# Altium PCB YAVP.PcbDoc (part 3 of 4)
Units mil, origin at the board's own origin, x right, y up, seen from the top; angles counter-clockwise.
Board outline 3188.93 x 2893.7 mil, 6 copper layers (Top Layer, Top, Mid-Layer 1, Top-Int, Mid-Layer 2, Bop-Int, Mid-Layer 3, Top-Mid, Mid-Layer 4, Bop-Mid, Bottom Layer, Bottom); 418 components, 278 nets, 1150 pads, 440 vias.
Unrouted connection lines stored in the file: 12.
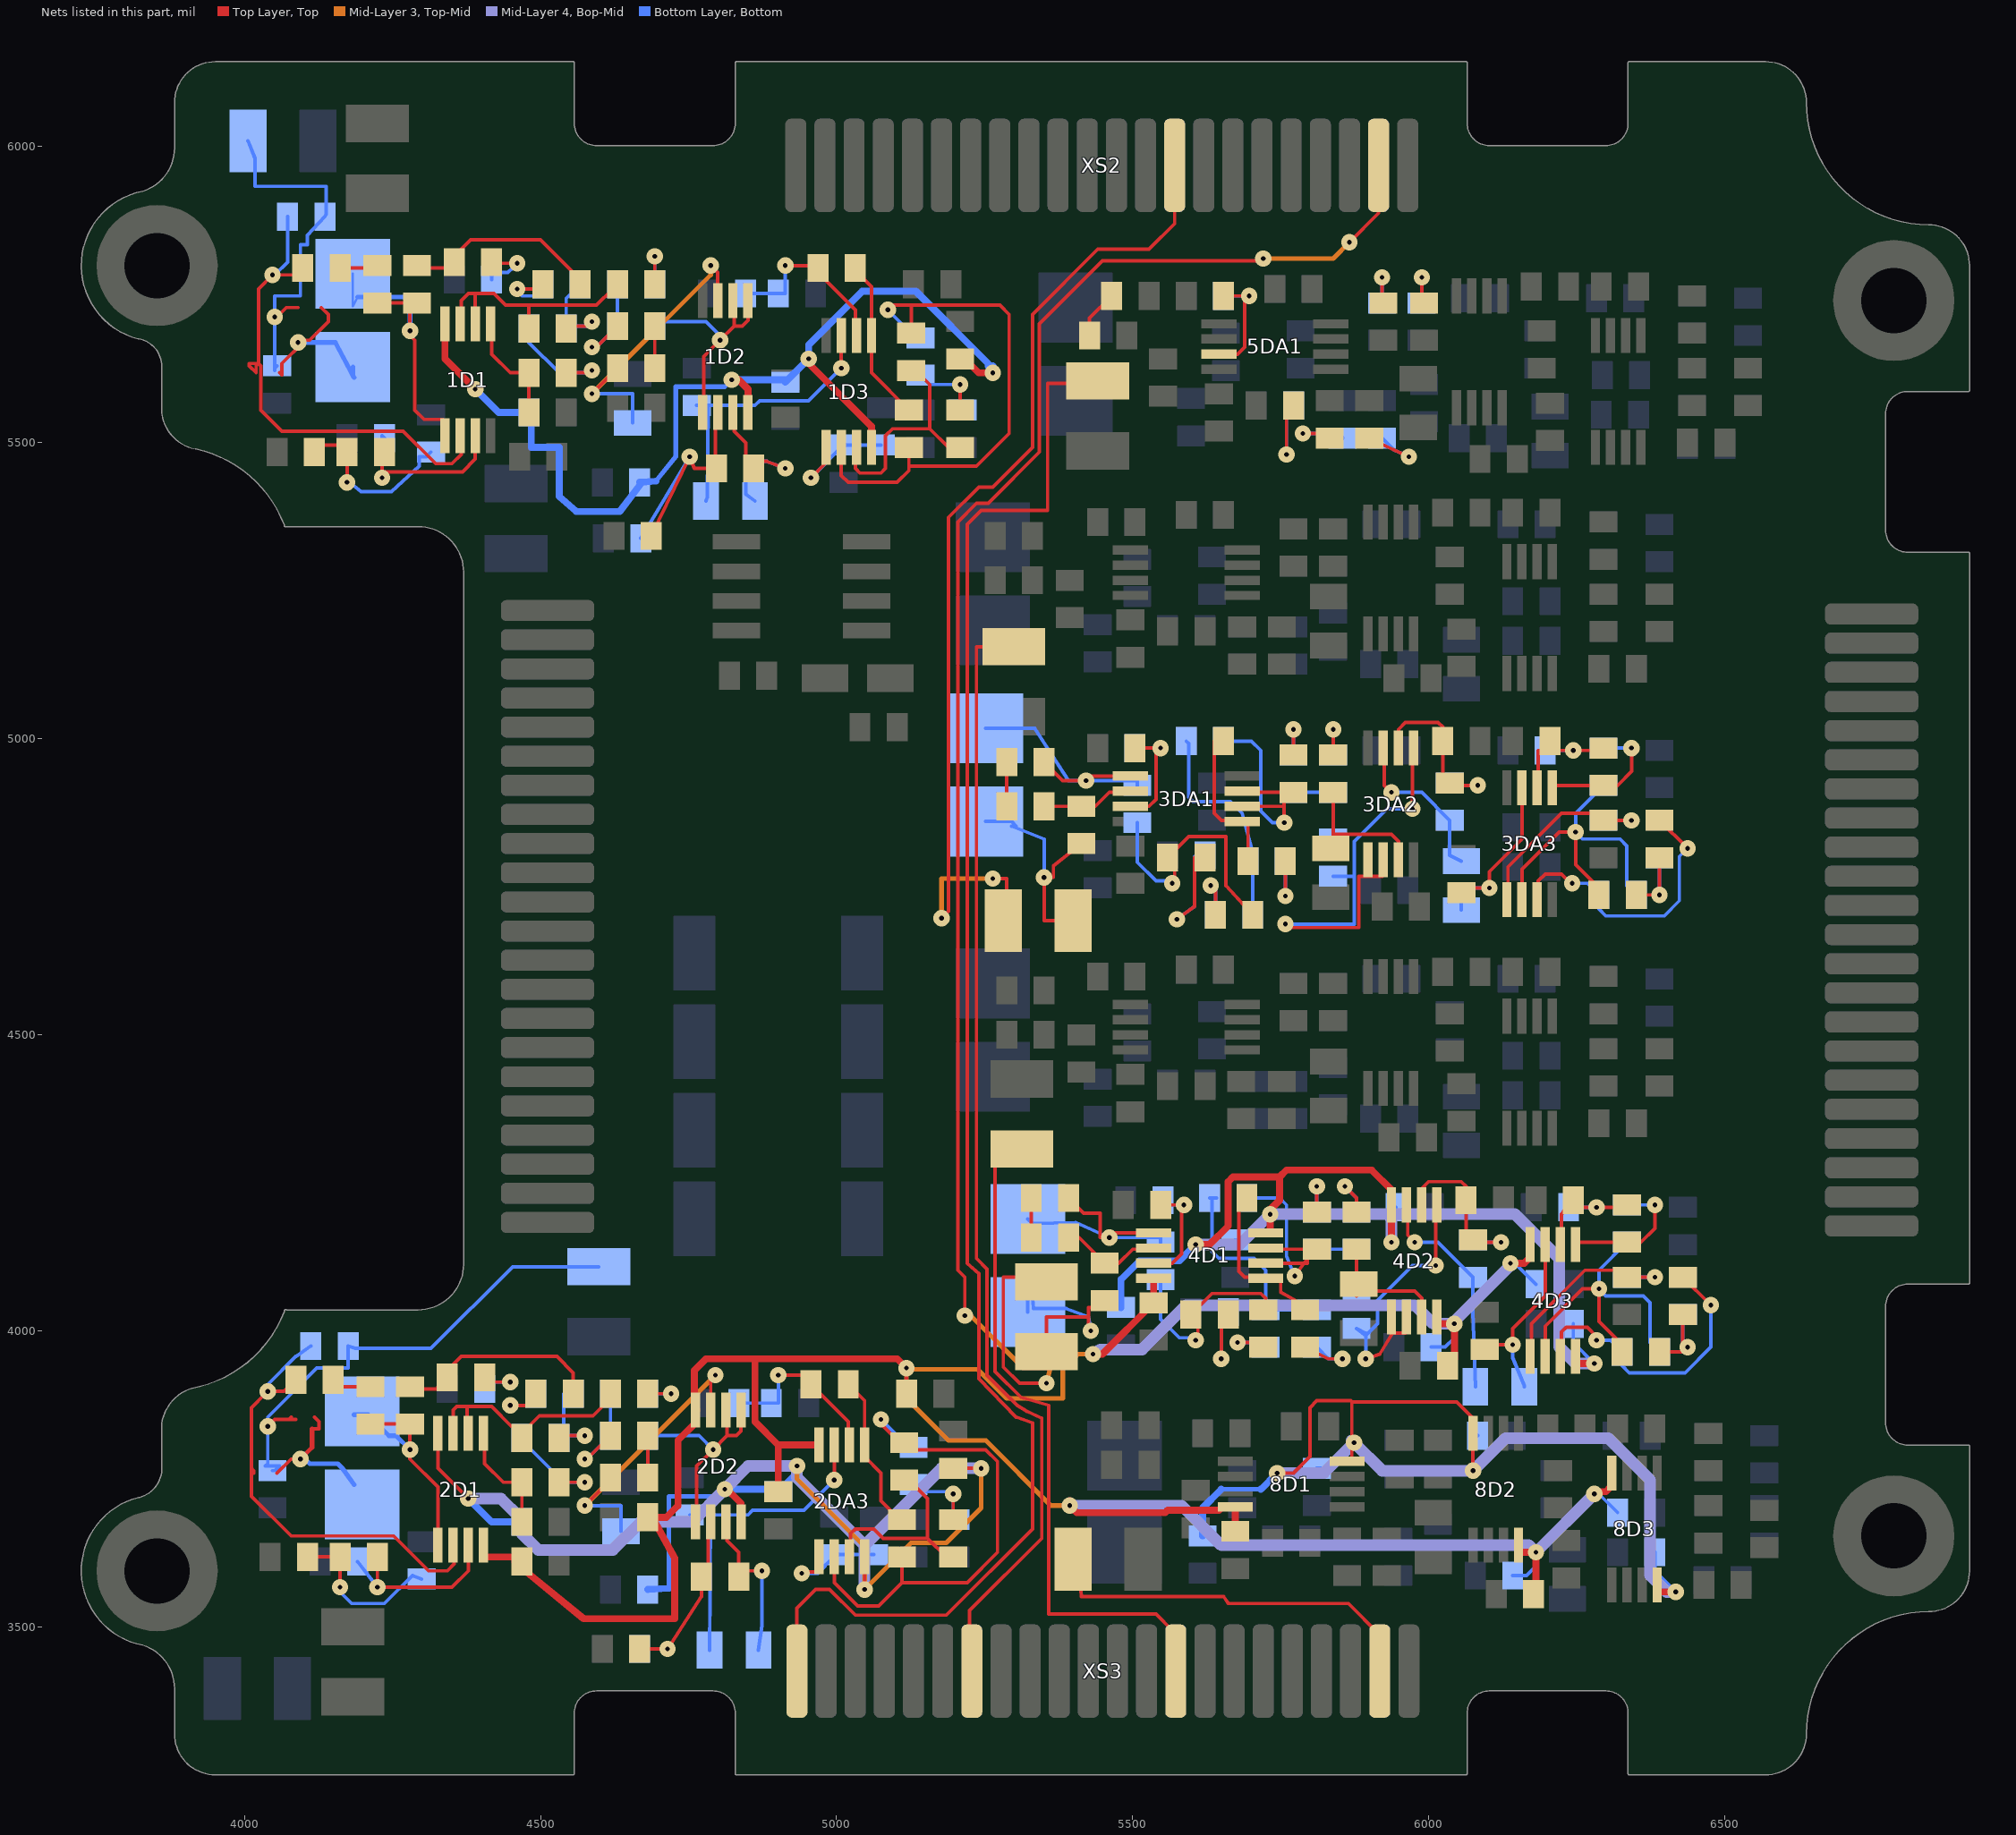
[diagram p7: the nets of this part, all layers, seen from the top]

## Via types
v1: diameter 27.56, hole 7.87, Top Layer, Top to Bottom Layer, Bottom, 440 vias

## Nets (pads, with @x,y where several pads share a name; then routed paths per layer and width w, separated by ;. In a path a pad name is that pad's centre, name@x,y a point inside that pad or via, vN(x,y) a via of type N, cw(c..) or ccw(c..) an arc to the next point about the centre after c; other vN are vias at no path point) (continued)
IN3Q: 3C1.1 XS2.34 | length 1789.6
  Top Layer, Top w5.91: v1(5177.17,4696.85) 5188.98,4708.66 5188.98,5374.02 5240.16,5425.2 5263.78,5425.2 5330.71,5492.13 5330.71,5716.54 5440.94,5826.77 5527.56,5826.77 5570.87,5870.08 XS2.34@5570.87,5968.5 ; v1(5263.78,4763.78) 5287.4,4763.78 3C1.1@5287.4,4687.01 ; 3C1.1@5287.4,4687.01 5287.4,4677.17 5281.5,4683.07 3C1.1@5281.5,4692.91 3C1.1@5287.4,4687.01
  Mid-Layer 3, Top-Mid w7.87: v1(5177.17,4696.85) 5177.17,4763.78 v1(5263.78,4763.78)
IN4Q: 4C1.1 XS2.41 | length 3020.6
  Top Layer, Top w5.91: v1(5216.54,4025.59) 5216.54,4090.55 5204.72,4102.36 5204.72,5366.14 5236.22,5397.64 5255.91,5397.64 5342.52,5484.25 5342.52,5700.79 5448.82,5807.09 5720.47,5807.09 v1(5720.47,5811.02) ; v1(5354.33,3911.42) 5309.06,3911.42 5281.5,3938.98 5281.5,4090.55 5338.58,4090.55 5348.43,4080.71 5354.33,4086.61 4C1.1@5354.33,4082.68 ; v1(5866.14,5838.58) 5915.35,5887.8 XS2.41@5915.35,5968.5
  Mid-Layer 3, Top-Mid w7.87: v1(5216.54,4025.59) 5216.54,4035.43 5314.96,3937.01 5358.27,3937.01 5360.24,3935.04 v1(5354.33,3911.42) ; v1(5720.47,5811.02) 5838.58,5811.02 v1(5866.14,5838.58)
IN5Q: 5C1.1 XS3.42 | length 2829.7
  Top Layer, Top w5.91: XS3.42@4933.07,3425.2 4933.07,3531.5 4964.57,3562.99 4988.19,3562.99 5031.5,3519.68 5185.04,3519.68 5330.71,3665.35 5330.71,3844.49 5303.15,3854.33 5240.16,3919.29 5240.16,4096.46 5220.47,4114.17 5220.47,5362.2 5244.09,5385.83 5356.3,5385.83 5356.3,5600.39 5C1.1@5407.48,5600.39 ; 5C1.1@5407.48,5600.39 5440.94,5600.39 5C1.1@5440.94,5604.33 5411.42,5604.33 5C1.1@5407.48,5600.39
IN6Q: 6C1.1 XS3.36 | length 1899.1
  Top Layer, Top w5.91: XS3.36@5228.35,3425.2 5228.35,3500 5224.41,3503.94 5224.41,3527.56 5346.46,3649.61 5346.46,3852.36 5320.87,3864.17 5305.12,3874.02 5253.94,3925.2 5253.94,4104.33 5236.22,4122.05 5236.22,5155.51 6C1.1@5299.21,5155.51
IN7Q: 7C1.1 XS3.29 | length 1292.2
  Top Layer, Top w5.91: XS3.29@5570.87,3427.17 5570.87,3490.16 5566.93,3494.09 5539.37,3521.65 5358.27,3521.65 5358.27,3874.02 5311.02,3887.8 5267.72,3931.1 5267.72,4307.09 7C1.1@5285.43,4307.09 ; 7C1.1@5285.43,4307.09 5297.24,4307.09 7C1.1@5312.99,4307.09 5312.99,4322.83 5303.15,4332.68 5295.28,4332.68 7C1.1@5293.31,4330.71 ; 7C1.1@5285.43,4307.09 7C1.1@5289.37,4311.02 ; 7C1.1@5289.37,4311.02 5273.62,4311.02 7C1.1@5293.31,4330.71 ; 7C1.1@5289.37,4311.02 7C1.1@5293.31,4314.96 ; 7C1.1@5293.31,4314.96 7C1.1@5293.31,4316.93 ; 7C1.1@5293.31,4314.96 5295.28,4316.93 7C1.1@5293.31,4316.93 ; 7C1.1@5293.31,4316.93 7C1.1@5293.31,4330.71
  Top Layer, Top w7.87: XS3.29@5570.87,3427.17 5570.87,3425.2 XS3.29@5572.83,3425.2
IN8Q: 8C1.1 XS3.22 | length 669.8
  Top Layer, Top w5.91: 8C1.1@5399.61,3614.17 5409.45,3614.17 5413.39,3610.24 5413.39,3574.8 5411.42,3574.8 5413.39,3551.18 5653.54,3551.18 5661.42,3539.37 5864.17,3539.37 5917.32,3486.22 XS3.22@5917.32,3425.2
NET00000: 1D1.8 1D2.8 1D3.8 C14.1 C30.1 C46.1 R29.1 | length 1856.6
  Top Layer, Top w5.91: v1(4822.83,5606.3) v1@4834.65,5606.3 ; 1D2.8@4850.39,5551.18 1D2.8@4850.39,5578.74 ; R29.1@5208.66,5641.73 5208.66,5645.67 R29.1@5208.66,5649.61
  Top Layer, Top w11.81: 1D1.8@4338.58,5700.79 4338.58,5641.73 v1(4389.76,5590.55) ; v1@4834.65,5606.3 4850.39,5590.55 1D2.8@4850.39,5578.74 ; v1(4952.76,5641.73) 4952.76,5633.86 5059.06,5527.56 1D3.8@5059.06,5492.13 ; R29.1@5208.66,5649.61 5240.16,5618.11 v1(5263.78,5618.11)
  Bottom Layer, Bottom w5.91: C14.1@4480.31,5543.31 C14.1@4480.31,5551.18 ; 4811.02,5594.49 v1(4822.83,5606.3)
  Bottom Layer, Bottom w7.87: 4694.88,5435.04 4728.35,5476.38 4728.35,5594.49 4811.02,5594.49
  Bottom Layer, Bottom w11.81: v1(4389.76,5590.55) 4429.13,5551.18 C14.1@4480.31,5551.18 ; C14.1@4480.31,5543.31 4484.25,5539.37 4484.25,5492.13 4531.5,5492.13 4531.5,5409.45 4560.28,5383.86 4633.86,5383.86 4671.26,5433.07 4694.88,5435.04 C30.1@4667.32,5433.07 ; v1(4822.83,5606.3) 4913.39,5606.3 C46.1@4913.39,5602.36 4925.2,5614.17 v1(4952.76,5641.73) 4952.76,5665.35 5043.31,5755.91 5133.86,5755.91 5255.91,5633.86 5255.91,5629.92 5263.78,5629.92 v1(5263.78,5618.11)
NET1: 
NET00002: 2D1.4 2D2.4 2DA3.4 4D1.4 4D2.4 4D3.4 8D1.4 8D2.4 8D3.4 C17.2 C21.2 C29.2 C33.2 C37.2 C45.2 C48.2 C53.2 C60.2 R32.1 R36.1 R44.1 | length 5322.4
  Top Layer, Top w5.91: 2D1.4@4403.54,3637.8 4405.51,3637.8 2D1.4@4405.51,3618.11 ; R32.1@5118.11,3893.7 v1(5118.11,3937.01) ; 8D1.4@5651.57,3702.76 8D1.4@5673.23,3702.76 ; 4D2.4@6013.78,4023.62 6013.78,4013.78 4D2.4@6015.75,4011.81 ; 4D3.4@6171.26,4124.02 4D3.4@6171.26,4145.67 ; v1(6279.53,3724.41) v1@6283.46,3728.35 ; 8D3.4@6307.09,3736.22 8D3.4@6309.06,3759.84
  Top Layer, Top w11.81: 2D1.4@4405.51,3618.11 4456.69,3618.11 4456.69,3610.24 C17.2@4464.57,3602.36 ; C17.2@4468.5,3610.24 4468.5,3606.3 C17.2@4464.57,3602.36 ; C33.2@4681.1,3685.04 C33.2@4688.98,3685.04 ; 2D2.4@4763.78,3866.14 2D2.4@4761.81,3866.14 2D2.4@4759.84,3866.14 ; C48.2@4901.57,3728.35 4901.57,3807.09 ; 2DA3.4@4970.47,3807.09 4901.57,3807.09 ; v1(5118.11,3937.01) 5102.36,3952.76 4862.2,3952.76 ; v1@5393.7,3712.6 v1(5393.7,3704.72) 5393.7,3700.79 5397.64,3700.79 5405.51,3692.91 5555.12,3692.91 5559.06,3696.85 5645.67,3696.85 8D1.4@5651.57,3702.76 ; v1(5433.07,3960.63) 5448.82,3960.63 C21.2@5535.43,4047.24 4D1.4@5535.43,4088.58 ; C29.2@5673.23,3661.42 8D1.4@5673.23,3702.76 ; 4D2.4@6015.75,4011.81 v1(6043.31,4011.81) 6043.31,3952.76 R36.1@6031.5,3940.94 ; v1(6137.8,4114.17) 6161.42,4114.17 4D3.4@6171.26,4124.02 ; 8D2.4@6151.57,3637.8 6151.57,3625.98 v1(6181.1,3625.98) 6181.1,3574.8 6177.17,3570.87 6169.29,3566.93 6177.17,3559.06 R44.1@6177.17,3555.12 ; v1@6283.46,3728.35 6299.21,3728.35 8D3.4@6307.09,3736.22 ; C17.2@4464.57,3602.36 4572.83,3513.78 4726.38,3513.78 4726.38,3616.14 C33.2@4688.98,3685.04 ; C33.2@4688.98,3685.04 4712.6,3685.04 4732.28,3704.72 4732.28,3814.96 4759.84,3842.52 2D2.4@4759.84,3866.14 ; 2D2.4@4759.84,3866.14 4759.84,3933.07 4779.53,3952.76 4862.2,3952.76 ; 4862.2,3952.76 4862.2,3846.46 4901.57,3807.09
  Mid-Layer 3, Top-Mid w7.87: v1(5393.7,3704.72) 5362.2,3704.72 5251.97,3814.96 5188.98,3814.96 5118.11,3885.83 v1(5118.11,3937.01) 5118.11,3940.94 5122.05,3937.01 5124.02,3935.04 5238.19,3935.04 5287.4,3885.83 5381.89,3885.83 5381.89,3935.2 5407.32,3960.63 v1(5433.07,3960.63)
  Mid-Layer 4, Bop-Mid w5.91: v1(5433.07,3960.63) 5440.94,3968.5 5444.88,3968.5 ; v1@6031.5,4011.81 v1(6043.31,4011.81) v1@6043.31,4015.75 ; v1@6137.8,4110.24 6133.86,4114.17 v1(6137.8,4114.17) ; v1@6178.24,3628.85 6181.45,3628.85 6181.1,3628.5 v1(6181.1,3625.98) v1@6178.24,3628.85
  Mid-Layer 4, Bop-Mid w19.68: v1(5393.7,3704.72) 5582.68,3704.72 5649.61,3637.8 6169.29,3637.8 v1@6178.24,3628.85 ; v1(5433.07,3960.63) 5437.01,3960.63 5444.88,3968.5 5515.75,3968.5 5590.55,4043.31 5976.38,4043.31 6007.87,4011.81 v1@6031.5,4011.81 ; v1@6043.31,4015.75 6137.8,4110.24 v1(6137.8,4114.17) ; v1(6181.1,3625.98) v1(6279.53,3724.41)
  Bottom Layer, Bottom w5.91: C37.2@6003.94,3972.44 6027.56,3972.44 6043.31,3988.19 v1(6043.31,4011.81) ; v1(6137.8,4114.17) 6145.67,4114.17 C53.2@6181.1,4078.74 ; C45.2@6141.73,3586.61 6165.35,3586.61 6181.1,3602.36 v1(6181.1,3625.98) ; v1(6279.53,3724.41) 6283.46,3728.35 C60.2@6318.9,3692.91
NET00003: 2D1.8 2D2.8 2DA3.8 4D1.8 4D2.8 4D3.8 8D1.8 8D2.8 8D3.8 C16.1 C22.1 C28.1 C32.1 C36.1 C44.1 C49.1 C52.1 C61.1 R31.1 R35.1 R43.1 | length 6706.1
  Top Layer, Top w5.91: 2D1.8@4326.77,3826.77 4326.77,3767.72 v1(4377.95,3716.54) ; v1(4811.02,3732.28) v1@4811.02,3736.22 ; 2D2.8@4838.58,3677.17 4838.58,3708.66 ; v1(5047.24,3562.99) 2DA3.8@5047.24,3618.11 ; R31.1@5196.85,3767.72 v1(5244.09,3767.72) ; 4D1.8@5724.41,4165.35 4D1.8@5732.28,4165.35 ; v1@5728.35,4200.79 v1(5732.28,4196.85) ; v1(5744.09,3759.84) 5771.65,3759.84 5799.21,3787.4 5799.21,3870.08 5811.02,3881.89 5868.11,3881.89 5870.08,3879.92 ; 8D1.8@5862.2,3779.53 5870.08,3779.53 5870.08,3807.09 v1(5874.02,3811.02) 5870.08,3814.96 5870.08,3879.92 ; v1(6074.8,3763.78) 8D2.8@6074.8,3826.77 6074.8,3850.39 6074.8,3852.36 6047.24,3879.92 5870.08,3879.92 ; 4D3.8@6248.03,3944.88 4D3.8@6248.03,3956.69 ; 8D3.8@6385.83,3559.06 8D3.8@6385.83,3570.87
  Top Layer, Top w11.81: v1@4811.02,3736.22 4838.58,3708.66 ; v1(5606.3,4145.67) 5629.92,4145.67 5661.42,4177.17 5661.42,4251.97 5669.29,4259.84 5748.03,4259.84 ; v1@5728.35,4200.79 5748.03,4220.47 5748.03,4259.84 ; 4D1.8@5732.28,4165.35 v1(5732.28,4196.85) ; v1(5937.01,4149.61) 4D2.8@5937.01,4212.6 5937.01,4238.19 5903.54,4271.65 5759.84,4271.65 5748.03,4259.84 ; 4D3.8@6248.03,3944.88 v1(6279.53,3944.88) ; 8D3.8@6385.83,3559.06 v1(6417.32,3559.06)
  Mid-Layer 3, Top-Mid w7.87: v1(4933.07,3771.65) 4933.07,3750 5047.24,3635.83 v1(5047.24,3562.99) 5125.98,3641.73 5185.04,3641.73 5244.09,3700.79 v1(5244.09,3767.72)
  Mid-Layer 4, Bop-Mid w5.91: v1@6275.59,3944.88 v1(6279.53,3944.88)
  Mid-Layer 4, Bop-Mid w19.68: v1(4377.95,3716.54) 4433.07,3716.54 4464.57,3685.04 4468.5,3657.48 4496.06,3629.92 4622.05,3629.92 4669.29,3677.17 4755.91,3677.17 v1(4811.02,3732.28) 4850.39,3771.65 v1(4933.07,3771.65) 4933.07,3751.97 5047.24,3637.8 ; v1(5047.24,3562.99) 5047.24,3637.8 ; v1(5244.09,3767.72) 5177.17,3767.72 5047.24,3637.8 ; v1(5606.3,4145.67) 5681.1,4145.67 v1(5732.28,4196.85) 5937.01,4196.85 ; v1(5744.09,3759.84) 5822.83,3759.84 v1(5874.02,3811.02) ; v1@5870.08,3814.96 v1(5874.02,3811.02) ; v1(5937.01,4149.61) 5937.01,4196.85 ; v1@6275.59,3944.88 6248.03,3944.88 6220.47,3972.44 6220.47,4122.05 6145.67,4196.85 5937.01,4196.85 ; v1(6417.32,3559.06) 6401.57,3559.06 6374.02,3586.61 6374.02,3748.03 6303.15,3818.9 6129.92,3818.9 v1(6074.8,3763.78) 5921.26,3763.78 v1(5874.02,3811.02)
  Bottom Layer, Bottom w5.91: C49.1@4901.57,3728.35 C49.1@4901.57,3732.28 ; C22.1@5673.23,4153.54 5681.1,4153.54 5724.41,4196.85 v1(5732.28,4196.85) ; C28.1@5811.02,3767.72 5826.77,3767.72 5830.71,3767.72 v1(5874.02,3811.02) ; v1(5937.01,4149.61) 5937.01,4208.66 C36.1@5944.88,4208.66 ; v1(6074.8,3763.78) 6074.8,3822.83 C44.1@6082.68,3822.83 ; C52.1@6244.09,4011.81 6244.09,3980.32 v1(6279.53,3944.88) ; C61.1@6381.89,3625.98 6381.89,3594.49 v1(6417.32,3559.06)
  Bottom Layer, Bottom w7.87: 4716.54,3564.96 4716.54,3720.47 4795.28,3720.47 ; 5649.61,3732.28 5716.54,3732.28
  Bottom Layer, Bottom w11.81: v1(4377.95,3716.54) 4417.32,3677.17 C16.1@4464.57,3677.17 ; C32.1@4681.1,3562.99 4716.54,3564.96 ; 4795.28,3720.47 4807.09,3732.28 v1(4811.02,3732.28) C49.1@4901.57,3732.28 ; C49.1@4897.64,3724.41 C49.1@4901.57,3728.35 4933.07,3759.84 v1(4933.07,3771.65) ; R35.1@5480.31,4039.37 5480.31,4086.61 5511.81,4118.11 5578.74,4118.11 v1(5606.3,4145.67) ; R43.1@5618.11,3653.54 5618.11,3700.79 5649.61,3732.28 ; 5716.54,3732.28 v1(5744.09,3759.84)
  Bottom Layer, Bottom w19.68: C16.1@4464.57,3677.17 C16.1@4468.5,3677.17
NET00019: 2R6.1 2R7.2 | length 106.3
  Top Layer, Top w5.91: 2R6.1@4405.51,3921.26 4405.51,3913.39 v1(4448.82,3913.39)
  Bottom Layer, Bottom w5.91: 2R7.2@4405.51,3901.57 4405.51,3913.39 v1(4448.82,3913.39)
NET00020: 2R8.1 2R9.2 | length 129.9
  Top Layer, Top w5.91: v1(4448.82,3874.02) 4492.13,3874.02 2R8.1@4492.13,3893.7 2R8.1@4492.13,3897.64
  Bottom Layer, Bottom w5.91: v1(4448.82,3874.02) 4492.13,3874.02 2R9.2@4492.13,3893.7
NET00034: 2R3.1 2R4.2 | length 74.8
  Top Layer, Top w5.91: 2R3.1@4149.61,3917.32 4149.61,3905.51 2R4.2@4212.6,3905.51
NET00037: 2R12.1 2R13.2 | length 78.7
  Top Layer, Top w5.91: 2R12.1@4681.1,3893.7 v1(4720.47,3893.7)
  Bottom Layer, Bottom w5.91: 2R13.2@4681.1,3893.7 v1(4720.47,3893.7)
NET00045: 2R10.1 2R11.2 | length 188.5
  Top Layer, Top w5.91: 2R11.2@4531.5,3744.09 v1(4574.8,3744.09)
  Bottom Layer, Bottom w5.91: 2R10.1@4468.5,3818.9 4464.57,3818.9 4539.37,3744.09 v1(4574.8,3744.09)
NET00046: 2R14.1 2R15.2 | length 70.9
  Top Layer, Top w5.91: 2R15.2@4681.1,3751.97 2R14.1@4681.1,3822.83
NET00047: 2C1.2 2JP1Q.1 2R1.2 2R5U.1 | length 869.1
  Top Layer, Top w5.91: v1(4039.37,3838.58) 4051.18,3850.39 4074.8,3850.39 ; 2JP1Q.1@4078.74,3854.33 4074.8,3850.39 ; 4086.61,3850.39 4074.8,3850.39
  Bottom Layer, Bottom w5.91: 2R5U.1@4047.24,3763.78 4051.18,3763.78 4059.06,3771.65 4035.43,3771.65 4039.37,3775.59 4039.37,3834.65 v1(4039.37,3838.58) 4039.37,3854.33 4122.05,3937.01 4175.2,3937.01 2R1.2@4175.2,3974.41 4187.01,3970.47 4314.96,3970.47 4452.76,4108.27 2C1.2@4598.43,4108.27
NET00049: 2R1U.1 2R2.1 2R3_.2 | length 280.8
  Top Layer, Top w5.91: 2R1U.1@4106.3,3618.11 2R3_.2@4161.42,3618.11 v1(4161.42,3566.93)
  Bottom Layer, Bottom w5.91: v1(4161.42,3566.93) 4161.42,3559.06 4181.1,3539.37 4236.22,3539.37 4283.46,3586.61 2R2.1@4299.21,3580.71
NET00052: 2C2.1 2D1.3 2R3_.1 | length 314.2
  Top Layer, Top w5.91: 2R3_.1@4224.41,3618.11 v1(4224.41,3566.93) 4350.39,3566.93 4377.95,3594.49 2D1.3@4377.95,3637.8
  Bottom Layer, Bottom w5.91: 2C2.1@4190.94,3610.24 v1(4224.41,3566.93)
NET00053: 2C3.1 2D1.1 2R4.1 2R5Q.2 | length 410.2
  Top Layer, Top w5.91: 2R4.1@4212.6,3842.52 2R5Q.2@4279.53,3842.52 v1(4279.53,3799.21) 4279.53,3783.46 4326.77,3736.22 2D1.1@4326.77,3637.8
  Bottom Layer, Bottom w7.87: 2C3.1@4185.04,3858.27 4208.66,3858.27 4244.09,3822.83 4255.91,3822.83 v1(4279.53,3799.21)
NET00054: 2C3.2 2JP1Q.2 2JP1U.2 | length 254.5
  Top Layer, Top w5.91: 2JP1U.2@4055.12,3759.84 4078.74,3783.46 v1(4094.49,3783.46) ; 4114.17,3834.65 4125.98,3834.65 4125.98,3846.46 2JP1Q.2@4118.11,3854.33
  Top Layer, Top w7.87: v1(4094.49,3783.46) 4114.17,3803.15 4114.17,3834.65
  Bottom Layer, Bottom w7.87: v1(4094.49,3783.46) 4102.36,3783.46 4110.24,3775.59 4157.48,3775.59 4165.35,3767.72 2C3.2@4185.04,3740.16
NET00055: 2D1.2 2JP1U.1 2R1.1 2R3.2 | length 812
  Top Layer, Top w5.91: 2JP1U.1@4015.75,3759.84 4015.75,3763.78 4011.81,3767.72 ; v1@4039.37,3905.51 v1@4039.37,3901.57 ; 2R3.2@4086.61,3917.32 4078.74,3909.45 4066.93,3897.64 v1(4039.37,3897.64) ; 2D1.2@4352.36,3637.8 4354.33,3637.8 4354.33,3606.3 4342.52,3594.49 4311.02,3594.49 4251.97,3653.54 4078.74,3653.54 4011.81,3720.47 4011.81,3767.72 ; 4011.81,3767.72 4011.81,3870.08 4035.43,3893.7 v1@4035.43,3897.64 ; v1@4035.43,3897.64 v1(4039.37,3897.64) ; v1@4035.43,3897.64 v1@4039.37,3901.57 ; v1(4039.37,3897.64) v1@4039.37,3901.57
  Bottom Layer, Bottom w5.91: v1(4039.37,3897.64) 4039.37,3909.45 4086.61,3956.69 2R1.1@4112.2,3974.41
NET00056: 2R5Q.1 2R6.2 2R8.2 | length 360.7
  Top Layer, Top w5.91: 2R5Q.1@4279.53,3905.51 4279.53,3901.57 4326.77,3901.57 4326.77,3905.51 2R6.2@4342.52,3921.26 4346.46,3925.2 4350.39,3925.2 4350.39,3940.94 4366.14,3956.69 4527.56,3956.69 4555.12,3929.13 4555.12,3913.39 2R8.2@4555.12,3893.7
NET00057: 2C4.1 2R9.1 2R10.2 | length 186.7
  Top Layer, Top w5.91: 2C4.1@4531.5,3818.9 4531.5,3822.83 v1(4574.8,3822.83)
  Bottom Layer, Bottom w5.91: 2R9.1@4555.12,3893.7 4539.37,3893.7 2R10.2@4539.37,3822.83 ; v1(4574.8,3822.83) 2R10.2@4539.37,3822.83 ; 2R10.2@4535.43,3822.83 2R10.2@4539.37,3822.83 ; 2R10.2@4535.43,3822.83 2R10.2@4531.5,3818.9 4531.5,3822.83 2R10.2@4535.43,3822.83
NET00059: 2C5.1 2D1.5 2R11.1 | length 196.1
  Top Layer, Top w5.91: 2D1.5@4403.54,3826.77 4405.51,3826.77 4405.51,3775.59 4437.01,3744.09 2R11.1@4468.5,3744.09 2C5.1@4468.5,3677.17
NET00060: 2C4.2 2D1.6 2D1.7 2R12.2 | length 422.3
  Top Layer, Top w5.91: 2D1.7@4352.36,3826.77 4354.33,3826.77 4352.36,3828.74 4352.36,3866.14 4358.27,3872.05 4375.98,3872.05 ; 2D1.6@4377.95,3826.77 4375.98,3828.74 4375.98,3872.05 ; 2C4.2@4468.5,3818.9 4468.5,3826.77 2C4.2@4480.31,3838.58 ; 2R12.2@4618.11,3893.7 4618.11,3885.83 4588.58,3856.3 4498.03,3856.3 2C4.2@4480.31,3838.58 ; 4375.98,3872.05 4417.32,3872.05 4450.79,3838.58 2C4.2@4480.31,3838.58
NET00061: 2C7.1 2D2.3 2R15.1 | length 543.6
  Top Layer, Top w5.91: v1(4574.8,3704.72) 4618.11,3748.03 2R15.1@4618.11,3751.97 ; 2D2.3@4787.4,3866.14 4787.4,3917.32 v1(4795.28,3925.2)
  Mid-Layer 3, Top-Mid w7.87: v1(4574.8,3704.72) v1(4795.28,3925.2)
  Bottom Layer, Bottom w5.91: v1(4574.8,3704.72) 4635.83,3704.72 2C7.1@4635.83,3661.42
NET00064: 2C6.1 2R13.1 2R14.2 | length 190.1
  Top Layer, Top w5.91: v1(4574.8,3783.46) 4578.74,3783.46 2R14.2@4618.11,3822.83
  Bottom Layer, Bottom w5.91: v1(4574.8,3783.46) 4578.74,3783.46 2C6.1@4618.11,3822.83 2R13.1@4618.11,3893.7
NET00065: 2C8.1 2D2.7 2R17.1 | length 276.3
  Top Layer, Top w5.91: 2D2.7@4812.99,3677.17 4814.96,3677.17 4814.96,3645.67 4834.65,3625.98 2R17.1@4834.65,3594.49 ; 2R17.1@4834.65,3584.65 2R17.1@4834.65,3594.49 ; v1(4874.02,3594.49) 2R17.1@4834.65,3594.49
  Bottom Layer, Bottom w5.91: 2C8.1@4868.11,3460.63 4874.02,3501.97 v1(4874.02,3594.49)
NET00066: 2C6.2 2D2.1 2D2.2 2D2.5 | length 396.5
  Top Layer, Top w5.91: 2D2.5@4761.81,3677.17 4763.78,3677.17 4763.78,3771.65 v1(4791.34,3799.21) 4814.96,3822.83 ; 2D2.2@4812.99,3866.14 4814.96,3866.14 4814.96,3822.83 ; 2D2.1@4838.58,3866.14 4838.58,3830.71 4830.71,3822.83 4814.96,3822.83
  Bottom Layer, Bottom w5.91: 2C6.2@4681.1,3822.83 4767.72,3822.83 v1(4791.34,3799.21)
NET00067: 2D2.6 2R16.1 2R17.2 2R18.1 | length 334.7
  Top Layer, Top w5.91: 2R18.1@4667.32,3462.6 v1(4714.57,3462.6) 4771.65,3551.18 2R17.2@4771.65,3584.65 4783.46,3596.46 4783.46,3602.36 4783.46,3677.17 2D2.6@4787.4,3677.17
  Bottom Layer, Bottom w5.91: 2R16.1@4667.32,3462.6 v1(4714.57,3462.6)
NET00077: 2C8.2 2DA3.3 2R19.1 | length 556
  Top Layer, Top w5.91: v1(4996.06,3748.03) 2DA3.3@4996.06,3807.09
  Bottom Layer, Bottom w5.91: 2R19.1@4751.97,3688.98 4787.4,3688.98 ; 2C8.2@4785.43,3460.63 4787.4,3688.98 ; v1(4996.06,3748.03) 4944.88,3696.85 4858.27,3696.85 4850.39,3688.98 4787.4,3688.98
NET00082: 2DA3.2 2R20.1 2R21.2 2R22.1 | length 328.7
  Top Layer, Top w5.91: v1(4901.57,3925.2) 4946.85,3925.2 2R21.2@4956.69,3915.35 ; 2DA3.2@5021.65,3807.09 5019.69,3807.09 5019.69,3846.46 2R21.2@4956.69,3909.45 2R21.2@4956.69,3915.35 ; 2R21.2@4956.69,3915.35 4960.63,3911.42 4960.63,3919.29 2R21.2@4956.69,3915.35
  Bottom Layer, Bottom w5.91: 2R20.1@4834.65,3877.95 2R22.1@4889.76,3877.95 4901.57,3877.95 v1(4901.57,3925.2)
NET00092: 2DA3.1 2R21.1 2R23.2 | length 273.7
  Top Layer, Top w5.91: 2R21.1@5019.69,3909.45 5047.24,3881.89 5047.24,3822.83 2DA3.1@5047.24,3807.09 5047.24,3787.4 5074.8,3759.84 5074.8,3712.6 5110.24,3677.17 2R23.2@5110.24,3681.1
NET00097: 2C9.1 2DA3.6 2R23.1 2R26.2 | length 890.8
  Top Layer, Top w5.91: 2DA3.6@4996.06,3618.11 4996.06,3590.55 4996.06,3574.8 5035.43,3535.43 5070.87,3535.43 5110.24,3574.8 ; v1@5074.8,3858.27 v1(5074.8,3850.39) 5074.8,3842.52 2C9.1@5114.17,3803.15 ; 2R23.1@5110.24,3618.11 5110.24,3574.8 ; 2C9.1@5114.17,3811.02 2C9.1@5114.17,3803.15 ; 5110.24,3574.8 5220.47,3574.8 5271.65,3625.98 5271.65,3779.53 5251.97,3799.21 5118.11,3799.21 2C9.1@5114.17,3803.15
  Bottom Layer, Bottom w5.91: v1(5074.8,3850.39) 5122.05,3803.15 2R26.2@5129.92,3803.15
NET00099: 2C9.2 2DA3.7 2R27.2 | length 359.9
  Top Layer, Top w5.91: 2DA3.7@5019.69,3618.11 2DA3.7@5021.65,3618.11 5023.62,3618.11 5023.62,3657.48 5031.5,3665.35 5062.99,3665.35 5078.74,3649.61 5153.54,3649.61 ; 2C9.2@5114.17,3748.03 5129.92,3744.09 5129.92,3740.16 5133.86,3736.22 5153.54,3716.54 5153.54,3649.61 ; 2R27.2@5196.85,3618.11 5185.04,3618.11 5153.54,3649.61
NET00102: 2R26.1 2R27.1 2R28.1 | length 166.3
  Top Layer, Top w5.91: 2R27.1@5196.85,3681.1 v1(5196.85,3724.41)
  Bottom Layer, Bottom w5.91: 2R26.1@5129.92,3740.16 5133.86,3740.16 5145.67,3728.35 5196.85,3728.35 v1(5196.85,3724.41) 5196.85,3681.1 2R28.1@5200.79,3681.1
NET00104: 2DA3.5 2R24.1 2R25.1 | length 198.7
  Top Layer, Top w5.91: v1(4940.94,3590.55) 4942.91,3592.52 4968.5,3592.52 4968.5,3618.11 2DA3.5@4970.47,3618.11 2DA3.5@4972.44,3618.11
  Bottom Layer, Bottom w5.91: v1(4940.94,3590.55) 4968.5,3590.55 4980.31,3602.36 4978.35,3602.36 4992.13,3614.17 4996.06,3618.11 2R24.1@4996.06,3622.05 2R25.1@5062.99,3622.05
NET00105: 1C1.2 1JP1Q.1 1R1.2 1R5U.1 | length 634.4
  Top Layer, Top w5.91: v1(4051.18,5712.6) 4051.18,5708.66 4070.87,5728.35 1JP1Q.1@4090.55,5728.35
  Bottom Layer, Bottom w5.91: 1C1.2@4005.91,6009.84 4017.72,5980.31 4017.72,5933.07 4137.8,5933.07 4137.8,5885.83 1R1.2@4135.83,5881.89 4106.3,5850.39 4106.3,5834.65 4094.49,5834.65 4094.49,5748.03 4051.18,5748.03 v1(4051.18,5712.6) 1R5U.1@4051.18,5625.98 ; 1R5U.1@4051.18,5622.05 1R5U.1@4051.18,5625.98 ; 1R5U.1@4055.12,5629.92 1R5U.1@4051.18,5625.98
NET00107: 1R1U.1 1R2.1 1R3U.2 | length 304.7
  Top Layer, Top w5.91: 1R1U.1@4118.11,5484.25 4125.98,5492.13 4129.92,5492.13 4133.86,5496.06 4157.48,5496.06 4161.42,5492.13 4165.35,5492.13 1R3U.2@4173.23,5484.25 v1(4173.23,5433.07)
  Bottom Layer, Bottom w5.91: v1(4173.23,5433.07) 4173.23,5437.01 4196.85,5417.32 4248.03,5417.32 4295.28,5460.63 4295.28,5476.38 4307.09,5476.38 1R2.1@4314.96,5484.25
NET00109: 1C2.1 1D1.3 1R3U.1 | length 342.9
  Top Layer, Top w5.91: v1(4232.28,5440.94) v1@4232.28,5450.79 ; 1R3U.1@4232.28,5496.06 1R3U.1@4232.28,5488.19 ; 1R3U.1@4236.22,5484.25 1R3U.1@4232.28,5488.19 ; 1D1.3@4389.76,5511.81 4389.76,5472.44 4368.11,5450.79 v1@4232.28,5450.79 ; v1@4232.28,5450.79 1R3U.1@4232.28,5488.19
  Bottom Layer, Bottom w5.91: v1(4232.28,5440.94) 4232.28,5511.81 1C2.1@4236.22,5507.87
NET00110: 1R3.1 1R4.2 | length 104
  Top Layer, Top w5.91: 1R3.1@4161.42,5795.28 4157.48,5791.34 4157.48,5779.53 4157.48,5795.28 4224.41,5795.28 1R4.2@4224.41,5799.21
NET00111: 1C3.1 1D1.1 1R4.1 1R5.2 | length 552.6
  Top Layer, Top w5.91: 1R4.1@4224.41,5736.22 1R5.2@4279.53,5736.22 ; 1R5.2@4291.34,5736.22 1R5.2@4279.53,5736.22 ; 1D1.1@4338.58,5511.81 4338.58,5535.43 4334.65,5539.37 4303.15,5539.37 4287.4,5555.12 4287.4,5673.23 4279.53,5681.1 v1(4279.53,5688.98) 4279.53,5700.79 1R5.2@4279.53,5736.22
  Bottom Layer, Bottom w3.94: 1C3.1@4183.07,5785.43 4183.07,5730.31 1C3.1@4190.94,5746.06
  Bottom Layer, Bottom w7.87: 1C3.1@4190.94,5746.06 4279.53,5746.06 v1(4279.53,5688.98)
NET00112: 1C3.2 1JP1Q.2 1JP1U.2 | length 326.1
  Top Layer, Top w5.91: 1JP1U.2@4059.06,5618.11 4062.99,5614.17 4062.99,5618.11 4062.99,5633.86 4098.43,5669.29 v1(4090.55,5669.29) 4094.49,5673.23 4110.24,5673.23 4141.73,5704.72 4141.73,5716.54 1JP1Q.2@4129.92,5728.35
  Bottom Layer, Bottom w7.87: v1(4090.55,5669.29) 4098.43,5669.29 4153.54,5669.29 1C3.2@4183.07,5613.93 ; 1C3.2@4183.07,5627.95 1C3.2@4183.07,5613.93 ; 1C3.2@4183.07,5613.93 4183.07,5612.2 4185.04,5610.24 1C3.2@4183.07,5613.93
NET00113: 1D1.2 1JP1U.1 1R1.1 1R3.2 | length 877
  Top Layer, Top w5.91: 1R3.2@4098.43,5795.28 4086.61,5783.46 v1(4047.24,5783.46) 4023.62,5759.84 4023.62,5633.86 ; 1D1.2@4364.17,5511.81 4366.14,5511.81 4366.14,5484.25 4366.14,5480.31 4350.39,5464.57 4322.83,5464.57 4267.72,5519.69 4062.99,5519.69 4027.56,5555.12 4027.56,5629.92 4023.62,5633.86 ; 4023.62,5633.86 4019.68,5629.92 1JP1U.1@4019.69,5618.11 4007.87,5629.92 4007.87,5633.86 4023.62,5633.86
  Bottom Layer, Bottom w5.91: v1(4047.24,5783.46) 4051.18,5783.46 4072.83,5805.12 1R1.1@4072.83,5881.89
NET00114: 1R6.1 1R7Q.2 | length 105.8
  Top Layer, Top w5.91: 1R6.1@4417.32,5805.12 4423.23,5805.12 4425.2,5803.15 4452.76,5803.15 v1(4460.63,5803.15)
  Bottom Layer, Bottom w5.91: 1R7Q.2@4417.32,5775.59 4417.32,5787.4 4444.88,5787.4 4452.76,5795.28 v1(4460.63,5803.15)
NET00115: 1R5.1 1R6.2 1R8.2 | length 377.7
  Top Layer, Top w5.91: 1R5.1@4291.34,5799.21 4291.34,5795.28 4346.46,5795.28 1R6.2@4354.33,5803.15 ; 1R8.2@4566.93,5767.72 4566.93,5783.46 4562.99,5783.46 4559.06,5783.46 4555.12,5787.4 4500,5842.52 4381.89,5842.52 4354.33,5814.96 4354.33,5811.02 1R6.2@4354.33,5805.12 1R6.2@4354.33,5803.15 ; 1R6.2@4354.33,5803.15 4354.33,5791.34 4354.33,5787.4 1R6.2@4354.33,5803.15
NET00152: 3R8.1 3R9.2 | length 114.2
  Top Layer, Top w5.91: v1(5631.89,4751.97) 5639.76,4751.97 3R8.1@5639.76,4702.76
  Bottom Layer, Bottom w5.91: v1(5631.89,4751.97) 5639.76,4751.97 3R9.2@5639.76,4702.76
NET00153: 3R12.1 3R13.2 | length 86.6
  Top Layer, Top w5.91: 3R12.1@5771.65,4972.44 v1(5771.65,5015.75)
  Bottom Layer, Bottom w5.91: 3R13.2@5771.65,4972.44 v1(5771.65,5015.75)
NET00154: 3R6.1 3R7.2 | length 277.8
  Top Layer, Top w5.91: v1(5574.8,4694.88) 5604.33,4716.54 5604.33,4799.21 3R6.1@5622.05,4799.21
  Bottom Layer, Bottom w5.91: v1(5574.8,4694.88) 5604.33,4716.54 5604.33,4801.18 5618.11,4799.21 3R7.2@5622.05,4803.15
NET00155: 3R10.1 3R11.2 | length 118.1
  Top Layer, Top w5.91: v1(5757.87,4734.25) 3R11.2@5757.87,4793.31
  Bottom Layer, Bottom w5.91: v1(5757.87,4734.25) 3R10.1@5757.87,4793.31
NET00156: 3R3.1 3R4.2 | length 74.8
  Top Layer, Top w5.91: 3R3.1@5287.4,4885.83 3R4.2@5287.4,4960.63
NET00157: 3R14.1 3R15.2 | length 86.6
  Top Layer, Top w5.91: 3R15.2@5838.58,4972.44 v1(5838.58,5015.75)
  Bottom Layer, Bottom w5.91: 3R14.1@5838.58,4972.44 v1(5838.58,5015.75)
NET00163: 3C2.1 3DA1.3 3R2.1 | length 224.7
  Top Layer, Top w5.91: 3DA1.3@5496.06,4885.83 5527.56,4885.83 5539.37,4897.64 5539.37,4976.38 v1(5547.24,4984.25) 3C2.1@5503.94,4984.25
  Bottom Layer, Bottom w5.91: 3R2.1@5503.94,4984.25 v1(5547.24,4984.25)
NET00164: 3C3.1 3DA1.1 3R4.1 3R5.2 | length 488.2
  Top Layer, Top w5.91: 3R4.1@5350.39,4960.63 5381.89,4929.13 v1(5421.26,4929.13) ; 3DA1.1@5496.06,4937.01 v1@5425.2,4937.01 ; v1(5421.26,4929.13) 5425.2,4933.07 v1@5425.2,4937.01 ; v1(5421.26,4929.13) 5421.26,4937.01 v1@5425.2,4937.01
  Bottom Layer, Bottom w5.91: 3C3.1@5251.97,5017.72 5334.65,5017.72 5391.73,4929.13 v1(5421.26,4929.13) 5507.87,4929.13 3R5.2@5507.87,4921.26
NET00165: 3C1.2 3C3.2 3R1.2 | length 404.2
  Top Layer, Top w5.91: 3C1.2@5399.61,4692.91 5350.39,4692.91 v1(5350.39,4765.75) 5364.17,4765.75 5366.14,4765.75 5366.14,4785.43 3R1.2@5413.39,4822.83
  Bottom Layer, Bottom w5.91: 3C3.2@5251.97,4860.24 5295.28,4860.24 5303.15,4852.36 5295.28,4852.36 5350.39,4830.71 v1(5350.39,4765.75)
NET00166: 3DA1.2 3R1.1 3R3.2 | length 157.4
  Top Layer, Top w5.91: 3R3.2@5350.39,4885.83 3R1.1@5413.39,4885.83 5437.01,4885.83 5460.63,4909.45 5496.06,4909.45 3DA1.2@5496.06,4911.42
NET00167: 3R5.1 3R6.2 3R8.2 | length 462.4
  Top Layer, Top w5.91: v1(5566.93,4755.91) 5570.87,4759.84 5570.87,4799.21 3R6.2@5559.06,4799.21 5594.49,4834.65 5657.48,4834.65 5657.48,4751.97 3R8.2@5702.76,4702.76
  Bottom Layer, Bottom w5.91: 3R5.1@5507.87,4858.27 5507.87,4791.34 5539.37,4759.84 5566.93,4759.84 v1(5566.93,4755.91)
NET00168: 3C4.1 3R9.1 3R10.2 | length 380.6
  Bottom Layer, Bottom w5.91: 3C4.1@5590.55,4996.06 5594.49,4992.13 5594.49,4901.57 5602.36,4893.7 5665.35,4893.7 5685.04,4874.02 5702.76,4807.09 3R10.2@5702.76,4797.55 ; 3R10.2@5694.88,4793.31 3R10.2@5702.76,4797.55 ; 3R9.1@5702.76,4702.76 3R10.2@5702.76,4797.55
NET00169: 3C5.1 3DA1.5 3R11.1 | length 270.6
  Top Layer, Top w5.91: 3C5.1@5653.54,4996.06 5637.8,4996.06 5637.8,4874.02 5649.61,4862.2 5657.48,4862.2 3DA1.5@5685.04,4862.2 ; 3DA1.5@5685.04,4860.24 3DA1.5@5685.04,4862.2 ; 3R11.1@5694.88,4793.31 5694.88,4862.2 3DA1.5@5685.04,4862.2
NET00170: 3C4.2 3DA1.6 3DA1.7 3R12.2 | length 460.2
  Top Layer, Top w5.91: 3DA1.6@5685.04,4885.83 5755.91,4885.83 3R12.2@5755.91,4893.7 ; 3DA1.7@5685.04,4911.42 5685.04,4909.45 3R12.2@5755.91,4909.45 ; v1(5755.91,4858.27) 3R12.2@5755.91,4893.7 ; 3R12.2@5755.91,4893.7 3R12.2@5771.65,4909.45 3R12.2@5755.91,4909.45 ; 3R12.2@5755.91,4893.7 3R12.2@5755.91,4909.45
  Bottom Layer, Bottom w5.91: 3C4.2@5653.54,4996.06 5700.79,4996.06 5716.54,4980.31 5716.54,4877.95 5736.22,4858.27 v1(5755.91,4858.27)
NET00171: 3C7.1 3DA2.3 3R15.1 | length 250.2
  Top Layer, Top w5.91: 3C7.1@5834.65,4814.96 5830.71,4820.87 5838.58,4820.87 5838.58,4838.58 ; 3R15.1@5838.58,4909.45 5838.58,4838.58 ; 3DA2.3@5948.82,4795.28 5948.82,4826.77 5937.01,4838.58 5838.58,4838.58
NET00172: 3C6.1 3R13.1 3R14.2 | length 145.7
  Bottom Layer, Bottom w5.91: 3R13.1@5771.65,4909.45 3R14.2@5838.58,4909.45 3C6.1@5838.58,4830.71
NET00173: 3C8.1 3DA2.7 3R17.1 | length 280.7
  Top Layer, Top w5.91: 3DA2.7@5923.23,4984.25 5925.2,4984.25 5925.2,4921.26 v1(5937.01,4909.45)
  Bottom Layer, Bottom w5.91: v1(5937.01,4909.45) 5988.19,4909.45 3R17.1@6035.43,4862.2 6035.43,4803.15 3C8.1@6055.12,4793.31
NET00174: 1R8.1 1R9.2 | length 119.1
  Top Layer, Top w5.91: v1(4460.63,5759.84) 4468.5,5759.84 4500,5759.84 4503.94,5763.78 1R8.1@4503.94,5767.72
  Bottom Layer, Bottom w5.91: v1(4460.63,5759.84) 4468.5,5751.97 4468.5,5748.03 4503.94,5748.03 1R9.2@4503.94,5767.72
NET00175: 1C4.1 1R9.1 1R10.2 | length 184
  Top Layer, Top w5.91: 1C4.1@4543.31,5692.91 4543.31,5696.85 4578.74,5696.85 v1(4586.61,5704.72)
  Bottom Layer, Bottom w5.91: 1R10.2@4543.31,5692.91 1R10.2@4543.31,5696.85 ; 1R9.1@4566.93,5767.72 4562.99,5763.78 4543.31,5744.09 1R10.2@4543.31,5696.85 ; v1(4586.61,5704.72) 4582.68,5700.79 4582.68,5696.85 1R10.2@4543.31,5696.85
NET00176: 1R10.1 1R11.2 | length 197.7
  Top Layer, Top w5.91: 1R11.2@4543.31,5618.11 4582.68,5618.11 v1(4586.61,5622.05)
  Bottom Layer, Bottom w5.91: 1R10.1@4480.31,5692.91 4480.31,5669.29 4531.5,5618.11 4582.68,5618.11 v1(4586.61,5622.05)
NET00177: 3C6.2 3DA2.1 3DA2.2 3DA2.5 | length 829.9
  Top Layer, Top w5.91: v1(5757.87,4687.01) 5757.87,4681.1 5881.89,4681.1 5881.89,4767.72 3DA2.1@5897.64,4767.72 ; 3DA2.1@5897.64,4795.28 3DA2.1@5897.64,4767.72 ; 3DA2.2@5923.23,4795.28 5921.26,4795.28 5921.26,4767.72 5899.61,4767.72 3DA2.1@5897.64,4767.72 ; v1(5972.44,4881.89) 5972.44,4984.25 3DA2.5@5974.41,4984.25
  Bottom Layer, Bottom w5.91: v1(5757.87,4687.01) 5874.02,4687.01 5874.02,4767.72 ; 3C6.2@5838.58,4767.72 5874.02,4767.72 ; v1(5972.44,4881.89) 5929.13,4881.89 5874.02,4826.77 5874.02,4767.72
NET00178: 1C4.2 1D1.6 1D1.7 1R12.2 | length 426.1
  Top Layer, Top w5.91: 1D1.7@4364.17,5700.79 4366.14,5728.35 4366.14,5740.16 4377.95,5751.97 4389.76,5751.97 ; 1D1.6@4389.76,5700.79 4389.76,5751.97 ; 1C4.2@4480.31,5692.91 4480.31,5732.28 ; 1R12.2@4629.92,5767.72 4629.92,5759.84 4625.98,5759.84 4622.05,5759.84 4594.49,5732.28 4480.31,5732.28 ; 4389.76,5751.97 4421.26,5751.97 4440.94,5732.28 4480.31,5732.28
NET00179: 1C5.1 1D1.5 1R11.1 | length 194.6
  Top Layer, Top w5.91: 1D1.5@4415.35,5700.79 4417.32,5696.85 4417.32,5649.61 4448.82,5618.11 1R11.1@4480.31,5618.11 1C5.1@4480.31,5551.18
NET00180: 3DA2.6 3R16.1 3R17.2 3R18.1 | length 322.8
  Top Layer, Top w5.91: 3DA2.6@5948.82,4984.25 5948.82,5011.81 5948.82,5015.75 5960.63,5027.56 6015.75,5027.56 6023.62,5019.69 6023.62,5015.75 3R16.1@6023.62,4996.06 6023.62,4925.2 3R18.1@6035.43,4925.2 ; 3R18.1@6037.4,4925.2 3R18.1@6035.43,4925.2 ; v1(6082.68,4921.26) 6039.37,4921.26 3R18.1@6035.43,4925.2
  Bottom Layer, Bottom w5.91: 3R17.2@6035.43,4925.2 6035.43,4921.26 v1(6082.68,4921.26)
NET00182: 1C7.1 1D2.3 1R15.1 | length 545.3
  Top Layer, Top w5.91: v1(4586.61,5582.68) 4625.98,5622.05 4629.92,5622.05 1R15.1@4629.92,5625.98 ; v1(4787.4,5799.21) 4799.21,5787.4 1D2.3@4799.21,5740.16
  Mid-Layer 3, Top-Mid w7.87: v1(4586.61,5582.68) 4787.4,5783.46 4787.4,5797.24 v1(4787.4,5799.21)
  Bottom Layer, Bottom w5.91: v1(4586.61,5582.68) 4655.51,5582.68 1C7.1@4655.51,5533.46
NET00184: 3C8.2 3DA3.3 3R19.1 | length 331.9
  Top Layer, Top w5.91: 3R19.1@6055.12,4740.16 6055.12,4748.03 v1(6102.36,4748.03) 6102.36,4775.59 6157.48,4830.71 3DA3.3@6157.48,4917.32
  Bottom Layer, Bottom w5.91: 3C8.2@6055.12,4710.63 6055.12,4748.03 v1(6102.36,4748.03)
NET00186: 3DA3.2 3R20.1 3R21.2 3R22.1 | length 241.4
  Top Layer, Top w5.91: 3DA3.2@6181.1,4917.32 3DA3.2@6183.07,4917.32 6185.04,4917.32 6185.04,4980.31 6188.98,4980.31 3R20.1@6204.72,4996.06 6220.47,4980.31 v1(6244.09,4980.31) 6295.28,4980.31 3R21.2@6295.28,4984.25
  Bottom Layer, Bottom w5.91: 3R22.1@6196.85,4980.31 v1(6244.09,4980.31)
NET00187: 1C6.2 1D2.1 1D2.2 1D2.5 | length 409.5
  Top Layer, Top w5.91: 1D2.5@4773.62,5551.18 4775.59,5555.12 4775.59,5645.67 v1(4803.15,5673.23) 4826.77,5696.85 ; 1D2.2@4824.8,5740.16 4826.77,5740.16 4826.77,5696.85 ; 1D2.1@4850.39,5740.16 4850.39,5706.69 4840.55,5696.85 4826.77,5696.85
  Bottom Layer, Bottom w5.91: 1C6.2@4692.91,5696.85 4692.91,5704.72 4779.53,5704.72 4803.15,5681.1 v1(4803.15,5673.23)
NET00188: 3DA3.1 3R21.1 3R23.2 | length 234.2
  Top Layer, Top w5.91: 3DA3.1@6208.66,4917.32 6208.66,4921.26 3R21.1@6295.28,4921.26 6318.9,4921.26 6342.52,4944.88 v1(6342.52,4984.25)
  Bottom Layer, Bottom w5.91: 3R23.2@6295.28,4984.25 v1(6342.52,4984.25)
NET00194: 1C8.1 1D2.7 1R17.1 | length 323.9
  Top Layer, Top w5.91: 1D2.7@4824.8,5551.18 4826.77,5551.18 4826.77,5519.69 4846.46,5500 1R17.1@4846.46,5468.5 ; 1R17.1@4860.24,5456.69 1R17.1@4846.46,5468.5 ; v1(4913.39,5456.69) 4881.89,5468.5 1R17.1@4846.46,5468.5
  Bottom Layer, Bottom w5.91: 1C8.1@4862.2,5401.57 4846.46,5413.39 4846.46,5468.5 4881.89,5468.5 v1(4913.39,5456.69)
NET00195: 1D2.6 1R16.1 1R17.2 1R18.1 | length 466.7
  Top Layer, Top w5.91: 1R18.1@4687.01,5342.52 v1(4751.97,5476.38) 4759.84,5456.69 1R17.2@4797.24,5456.69 4795.28,5468.5 4795.28,5476.38 4795.28,5551.18 1D2.6@4799.21,5551.18
  Bottom Layer, Bottom w5.91: 1R16.1@4669.29,5338.58 v1(4751.97,5476.38)
NET00198: 1C8.2 1D3.3 1R19.1 | length 487.1
  Top Layer, Top w5.91: v1(5007.87,5625.98) 1D3.3@5007.87,5681.1
  Bottom Layer, Bottom w5.91: 1R19.1@4763.78,5562.99 1R19.1@4783.46,5562.99 ; 1C8.2@4779.53,5401.57 4781.5,5407.48 1R19.1@4783.46,5562.99 ; v1(5007.87,5625.98) 4952.76,5570.87 4870.08,5570.87 4862.2,5562.99 1R19.1@4783.46,5562.99
NET00199: 1D3.2 1R20.1 1R21_.2 1R22.1 | length 353.1
  Top Layer, Top w5.91: v1(4913.39,5799.21) 4954.72,5799.21 4964.57,5799.21 1R21_.2@4964.57,5783.46 ; 1R21_.2@4968.5,5795.28 1R21_.2@4968.5,5787.4 ; 1D3.2@5033.46,5681.1 5031.5,5685.04 5031.5,5724.41 1R21_.2@4968.5,5787.4 ; 1R21_.2@4964.57,5783.46 4964.57,5777.56 4962.6,5775.59 4956.69,5775.59 1R21_.2@4964.57,5783.46 ; 1R21_.2@4964.57,5783.46 1R21_.2@4968.5,5787.4
  Bottom Layer, Bottom w5.91: 1R20.1@4846.46,5751.97 1R22.1@4901.57,5751.97 4913.39,5751.97 v1(4913.39,5799.21)
NET00200: 1D3.1 1R21_.1 1R23.2 | length 277.7
  Top Layer, Top w5.91: 1R21_.1@5031.5,5795.28 5035.43,5791.34 5035.43,5787.4 5059.06,5763.78 1D3.1@5059.06,5681.1 5059.06,5677.17 5059.06,5618.11 1R23.2@5122.05,5555.12
NET00203: 1C9.1 1D3.6 1R23.1 1R26.2 | length 973
  Top Layer, Top w5.91: 1D3.6@5003.94,5472.44 1D3.6@5003.94,5484.25 ; 1D3.6@5007.87,5492.13 5003.94,5492.13 1D3.6@5003.94,5484.25 ; v1(5086.61,5724.41) 5086.61,5732.28 5125.98,5732.28 ; 1R23.1@5122.05,5492.13 5122.05,5484.25 5122.05,5460.63 ; 1C9.1@5125.98,5685.04 5125.98,5732.28 ; 1D3.6@5003.94,5484.25 5007.87,5488.19 5007.87,5444.88 5019.69,5433.07 5102.36,5433.07 5122.05,5452.76 5122.05,5460.63 ; 5122.05,5460.63 5236.22,5460.63 5291.34,5515.75 5291.34,5716.54 5275.59,5732.28 5125.98,5732.28
  Bottom Layer, Bottom w5.91: v1(5086.61,5724.41) 5133.86,5677.17 1R26.2@5141.73,5677.17
NET00204: 1C9.2 1D3.7 1R27.2 | length 410.2
  Top Layer, Top w5.91: 1D3.7@5033.46,5492.13 5031.5,5492.13 5031.5,5456.69 5039.37,5448.82 5074.8,5448.82 5082.68,5456.69 5082.68,5511.81 5094.49,5523.62 5157.48,5523.62 ; 1C9.2@5125.98,5622.05 5133.86,5622.05 5141.73,5614.17 5157.48,5598.43 5157.48,5523.62 ; 1R27.2@5208.66,5492.13 5188.98,5492.13 5157.48,5523.62
NET00205: 1R26.1 1R27.1 1R28.1 | length 164
  Top Layer, Top w5.91: 1R27.1@5208.66,5555.12 v1(5208.66,5598.43)
  Bottom Layer, Bottom w5.91: 1R26.1@5141.73,5614.17 5157.48,5598.43 v1(5208.66,5598.43) 5208.66,5555.12 1R28.1@5212.6,5555.12
NET00207: 1D3.5 1R24.1 1R25.1 | length 202.1
  Top Layer, Top w5.91: v1(4956.69,5440.94) 4980.31,5464.57 4980.31,5484.25 1D3.5@4982.28,5492.13
  Bottom Layer, Bottom w5.91: v1(4956.69,5440.94) 5007.87,5492.13 1R24.1@5011.81,5496.06 5023.62,5496.06 1R25.1@5074.8,5496.06
NET00210: 3C9.1 3DA3.6 3R23.1 3R26.2 | length 574.3
  Top Layer, Top w5.91: 3DA3.6@6157.48,4728.35 6157.48,4779.53 6220.47,4842.52 v1(6248.03,4842.52) 6248.03,4787.4 6287.4,4748.03 3R26.2@6287.4,4736.22
  Bottom Layer, Bottom w5.91: 3R23.1@6295.28,4921.26 6248.03,4874.02 v1(6248.03,4842.52) 6259.84,4830.71 6322.83,4830.71 6334.65,4818.9 6334.65,4751.97 3C9.1@6350.39,4736.22
NET00211: 3C9.2 3DA3.7 3R27.2 | length 491.4
  Top Layer, Top w5.91: 3DA3.7@6183.07,4728.35 6185.04,4728.35 6185.04,4759.84 6196.85,4771.65 6224.41,4771.65 6240.16,4755.91 v1(6242.13,4755.91) ; 3R27.2@6389.76,4862.2 v1(6437.01,4814.96)
  Bottom Layer, Bottom w5.91: v1(6242.13,4755.91) 6267.72,4755.91 3C9.2@6287.4,4736.22 6287.4,4712.6 6299.21,4700.79 6397.64,4700.79 6423.23,4726.38 6423.23,4801.18 v1(6437.01,4814.96)
NET00212: 3R26.1 3R27.1 3R28.1 | length 165.4
  Top Layer, Top w5.91: 3R26.1@6350.39,4736.22 v1(6389.76,4736.22) 3R27.1@6389.76,4799.21
  Bottom Layer, Bottom w5.91: v1(6389.76,4736.22) 3R28.1@6389.76,4799.21
NET00214: 3DA3.5 3R24.1 3R25.1 | length 362.3
  Top Layer, Top w5.91: 3DA3.5@6131.89,4728.35 6133.86,4728.35 6133.86,4783.46 6224.41,4874.02 6295.28,4874.02 3R24.1@6295.28,4862.2 v1(6342.52,4862.2)
  Bottom Layer, Bottom w5.91: 3R25.1@6295.28,4862.2 v1(6342.52,4862.2)
NET00435: 1R12.1 1R13.2 | length 94.5
  Top Layer, Top w5.91: 1R12.1@4692.91,5767.72 v1(4692.91,5814.96)
  Bottom Layer, Bottom w5.91: 1R13.2@4692.91,5767.72 v1(4692.91,5814.96)
NET00436: 1C6.1 1R13.1 1R14.2 | length 190.1
  Top Layer, Top w5.91: v1(4586.61,5661.42) 4594.49,5661.42 1R14.2@4629.92,5696.85
  Bottom Layer, Bottom w5.91: v1(4586.61,5661.42) 4590.55,5657.48 1C6.1@4629.92,5696.85 1R13.1@4629.92,5767.72
NET00437: 1R14.1 1R15.2 | length 70.9
  Top Layer, Top w5.91: 1R15.2@4692.91,5625.98 1R14.1@4692.91,5696.85
NET00438: 4R3.1 4R4.2 | length 66.9
  Top Layer, Top w5.91: 4R3.1@5328.74,4157.48 4R4.2@5328.74,4224.41
NET00439: 4R8.1 4R9.2 | length 114.2
  Top Layer, Top w5.91: v1(5677.17,3980.32) 5724.41,3980.32 5724.41,3972.44 4R8.1@5720.47,3972.44
  Bottom Layer, Bottom w5.91: v1(5677.17,3980.32) 5724.41,3980.32 4R9.2@5724.41,3972.44
NET00440: 4R12.1 4R13.2 | length 86.6
  Top Layer, Top w5.91: 4R12.1@5811.02,4200.79 v1(5811.02,4244.09)
  Bottom Layer, Bottom w5.91: 4R13.2@5811.02,4200.79 v1(5811.02,4244.09)
NET00441: 4R6.1 4R7.2 | length 174.9
  Top Layer, Top w5.91: v1(5649.61,3952.76) 5649.61,4027.56 4R6.1@5661.42,4027.56
  Bottom Layer, Bottom w5.91: v1(5649.61,3952.76) 5649.61,4027.56 5657.48,4027.56 4R7.2@5661.42,4031.5
NET00442: 4R10.1 4R11.2 | length 119.1
  Top Layer, Top w5.91: 4R11.2@5791.34,3972.44 5830.71,3952.76 v1(5854.33,3952.76)
  Bottom Layer, Bottom w5.91: 4R10.1@5811.02,3972.44 5830.71,3952.76 v1(5854.33,3952.76)
NET00443: 4R14.1 4R15.2 | length 102.9
  Top Layer, Top w5.91: v1(5858.27,4244.09) 5877.95,4224.41 4R15.2@5877.95,4200.79
  Bottom Layer, Bottom w5.91: v1(5858.27,4244.09) 5877.95,4224.41 4R14.1@5877.95,4200.79
NET00445: 4C2.1 4D1.3 4R2.1 | length 218.4
  Top Layer, Top w5.91: 4D1.3@5535.43,4114.17 5566.93,4114.17 5582.68,4129.92 v1@5582.68,4212.6 ; 4C2.1@5543.31,4212.6 v1@5582.68,4212.6 ; v1(5586.61,4212.6) v1@5582.68,4212.6
  Bottom Layer, Bottom w5.91: 4R2.1@5551.18,4220.47 5559.06,4212.6 v1(5586.61,4212.6)
NET00446: 4C3.1 4D1.1 4R4.1 4R5.2 | length 444.6
  Top Layer, Top w5.91: 4R4.1@5391.73,4224.41 5417.32,4198.82 5444.88,4198.82 5444.88,4157.48 v1(5460.63,4157.48) 5460.63,4165.35 4D1.1@5535.43,4165.35
  Bottom Layer, Bottom w5.91: 4C3.1@5322.83,4188.98 5330.71,4181.1 5403.54,4183.07 v1(5460.63,4157.48) 5547.24,4157.48 4R5.2@5547.24,4149.61
NET00447: 4C1.2 4C3.2 4R1.2 | length 389.6
  Top Layer, Top w5.91: 4C1.2@5354.33,3964.57 5354.33,4023.62 5425.2,4023.62 ; v1(5429.13,4000) 5425.2,4003.94 5425.2,4023.62 ; 4R1.2@5452.76,4051.18 5452.76,4039.37 5425.2,4039.37 5425.2,4023.62
  Bottom Layer, Bottom w5.91: 4C3.2@5322.83,4031.5 5322.83,4055.12 5330.71,4062.99 5332.68,4037.4 5387.8,4037.4 5425.2,4023.62 v1(5429.13,4000)
NET00448: 4D1.2 4R1.1 4R3.2 | length 173.4
  Top Layer, Top w5.91: 4R3.2@5391.73,4157.48 5409.45,4157.48 4R1.1@5452.76,4114.17 5476.38,4114.17 5500,4137.8 5535.43,4137.8 4D1.2@5535.43,4139.76
NET00449: 4R5.1 4R6.2 4R8.2 | length 360.1
  Top Layer, Top w5.91: 4R6.2@5598.43,4027.56 4R6.2@5610.24,4027.56 ; v1(5606.3,3984.25) 5610.24,3988.19 4R6.2@5610.24,4027.56 ; 4R8.2@5720.47,4035.43 5724.41,4035.43 5724.41,4055.12 5716.54,4062.99 5633.86,4062.99 5610.24,4039.37 4R6.2@5610.24,4027.56
  Bottom Layer, Bottom w5.91: 4R5.1@5547.24,4086.61 5547.24,4019.68 5578.74,3988.19 5602.36,3988.19 v1(5606.3,3984.25)
NET00450: 4C4.1 4R9.1 4R10.2 | length 359.5
  Bottom Layer, Bottom w5.91: 4C4.1@5629.92,4224.41 4C4.1@5633.86,4224.41 ; 4C4.1@5641.73,4224.41 4C4.1@5633.86,4224.41 ; 4R10.2@5811.02,4035.43 4R9.1@5724.41,4035.43 5724.41,4102.36 5704.72,4122.05 5645.67,4122.05 5633.86,4133.86 4C4.1@5633.86,4224.41
NET00451: 4C5.1 4D1.5 4R11.1 | length 332.8
  Top Layer, Top w5.91: 4C5.1@5692.91,4224.41 5679.13,4224.41 5679.13,4100.39 5688.98,4090.55 5696.85,4090.55 4D1.5@5750,4086.61 ; 4D1.5@5724.41,4088.58 4D1.5@5750,4086.61 ; 4R11.1@5791.34,4035.43 5803.15,4035.43 5750,4064.96 4D1.5@5750,4086.61
NET00452: 4C4.2 4D1.6 4D1.7 4R12.2 | length 436.6
  Top Layer, Top w5.91: 4D1.6@5724.41,4114.17 5789.5,4114.17 ; 4D1.7@5724.41,4139.76 5724.41,4137.8 4R12.2@5795.28,4137.8 ; v1(5773.62,4092.52) 5789.5,4114.17 ; 5789.5,4114.17 4R12.2@5795.28,4122.05 ; 5789.5,4114.17 5795.28,4114.17 4R12.2@5795.28,4122.05 ; 4R12.2@5795.28,4122.05 4R12.2@5811.02,4137.8 4R12.2@5795.28,4137.8 ; 4R12.2@5795.28,4122.05 4R12.2@5795.28,4137.8
  Bottom Layer, Bottom w5.91: 4C4.2@5692.91,4224.41 5748.03,4224.41 5759.84,4212.6 5759.84,4125.98 v1(5773.62,4092.52)
NET00453: 4C7.1 4D2.3 4R15.1 | length 225.4
  Top Layer, Top w5.91: 4C7.1@5877.95,4059.06 4C7.1@5877.95,4066.93 ; 4R15.1@5877.95,4137.8 4C7.1@5877.95,4066.93 ; 4D2.3@5988.19,4023.62 5988.19,4055.12 5976.38,4066.93 4C7.1@5877.95,4066.93
NET00454: 4C6.1 4R13.1 4R14.2 | length 137.8
  Bottom Layer, Bottom w5.91: 4R13.1@5811.02,4137.8 4R14.2@5877.95,4137.8 4C6.1@5877.95,4066.93
NET00455: 4C8.1 4D2.7 4R17.1 | length 377.8
  Top Layer, Top w5.91: 4D2.7@5962.6,4212.6 5964.57,4212.6 5964.57,4161.42 v1(5976.38,4149.61)
  Bottom Layer, Bottom w5.91: v1(5976.38,4149.61) 6015.75,4149.61 4R17.1@6074.8,4090.55 6074.8,4031.5 4C8.1@6078.74,3905.51
NET00456: 4C6.2 4D2.1 4D2.2 4D2.5 | length 522.3
  Top Layer, Top w5.91: v1(5893.7,3952.76) 5895.67,3952.76 5917.32,3960.63 4D2.1@5938.98,3996.06 ; 4D2.1@5937.01,4023.62 5937.01,3996.06 4D2.1@5938.98,3996.06 ; 4D2.2@5962.6,4023.62 5960.63,4023.62 5960.63,3996.06 4D2.1@5938.98,3996.06 ; v1(6011.81,4110.24) 6011.81,4212.6 4D2.5@6013.78,4212.6
  Bottom Layer, Bottom w5.91: v1(5893.7,3952.76) 4C6.2@5893.7,3992.13 ; v1(6011.81,4110.24) 6007.87,4110.24 5972.44,4110.24 5913.39,4051.18 5913.39,4011.81 4C6.2@5893.7,3992.13 ; 4C6.2@5893.7,3992.13 4C6.2@5877.95,4003.94 5893.7,3996.06 4C6.2@5893.7,3992.13
NET00457: 4D2.6 4R16.1 4R17.2 4R18.1 | length 318.5
  Top Layer, Top w5.91: 4D2.6@5988.19,4212.6 5988.19,4240.16 6000,4251.97 6055.12,4251.97 6062.99,4244.09 4R16.1@6062.99,4220.47 6062.99,4149.61 6070.87,4149.61 4R18.1@6074.8,4153.54 6078.74,4149.61 v1(6122.05,4149.61)
  Bottom Layer, Bottom w5.91: 4R17.2@6074.8,4153.54 6074.8,4149.61 v1(6122.05,4149.61)
NET00460: 4C8.2 4D3.3 4R19.1 | length 322
  Top Layer, Top w5.91: 4R19.1@6094.49,3968.5 6094.49,3976.38 v1(6141.73,3976.38) 6141.73,4003.94 6196.85,4059.06 4D3.3@6196.85,4145.67
  Bottom Layer, Bottom w5.91: v1(6141.73,3976.38) 6141.73,3954.72 6161.42,3907.48 4C8.2@6161.42,3905.51
NET00461: 4D3.2 4R20.1 4R21.2 4R22.1 | length 232.6
  Top Layer, Top w5.91: 4D3.2@6220.47,4145.67 4D3.2@6222.44,4145.67 6224.41,4145.67 6224.41,4196.85 6232.28,4208.66 4R20.1@6244.09,4220.47 6255.91,4208.66 v1(6283.46,4208.66) 6334.65,4208.66 4R21.2@6334.65,4212.6
  Bottom Layer, Bottom w5.91: 4R22.1@6236.22,4208.66 v1(6283.46,4208.66)
NET00462: 4D3.1 4R21.1 4R23.2 | length 234.2
  Top Layer, Top w5.91: 4D3.1@6248.03,4145.67 6248.03,4149.61 4R21.1@6334.65,4149.61 6358.27,4149.61 6381.89,4173.23 v1(6381.89,4212.6)
  Bottom Layer, Bottom w5.91: 4R23.2@6334.65,4212.6 v1(6381.89,4212.6)
NET00465: 4C9.1 4D3.6 4R23.1 4R26.2 | length 574.3
  Top Layer, Top w5.91: 4D3.6@6196.85,3956.69 6196.85,4007.87 6259.84,4070.87 v1(6287.4,4070.87) 6287.4,4015.75 6326.77,3976.38 4R26.2@6326.77,3964.57
  Bottom Layer, Bottom w5.91: 4R23.1@6334.65,4149.61 6287.4,4102.36 v1(6287.4,4070.87) 6299.21,4059.06 6362.2,4059.06 6374.02,4047.24 6374.02,3980.32 4C9.1@6389.76,3964.57
NET00466: 4C9.2 4D3.7 4R27.2 | length 503.3
  Top Layer, Top w5.91: 4D3.7@6222.44,3956.69 6224.41,3956.69 6224.41,3998.03 6232.28,4005.91 6267.72,4005.91 6283.46,3990.16 v1(6283.46,3984.25) ; 4R27.2@6429.13,4090.55 v1(6476.38,4043.31)
  Bottom Layer, Bottom w5.91: v1(6283.46,3984.25) 6307.09,3984.25 4C9.2@6326.77,3964.57 6326.77,3940.94 6338.58,3929.13 6433.07,3929.13 6476.38,3972.44 v1(6476.38,4043.31)
NET00467: 4R26.1 4R27.1 4R28.1 | length 167.3
  Top Layer, Top w5.91: 4R26.1@6389.76,3964.57 6429.13,3964.57 v1(6437.01,3972.44) 6429.13,3980.32 4R27.1@6429.13,4027.56
  Bottom Layer, Bottom w5.91: 4R28.1@6429.13,4027.56 6429.13,3980.32 v1(6437.01,3972.44)
NET00469: 4D3.5 4R24.1 4R25.1 | length 362.3
  Top Layer, Top w5.91: 4D3.5@6171.26,3956.69 6173.23,3956.69 6173.23,4011.81 6263.78,4102.36 6334.65,4102.36 4R24.1@6334.65,4090.55 v1(6381.89,4090.55)
  Bottom Layer, Bottom w5.91: 4R25.1@6334.65,4090.55 v1(6381.89,4090.55)
NET00471: 5R3.1 5R4.2 | length 82.4
  Top Layer, Top w5.91: 5R3.1@5427.17,5681.1 5427.17,5710.63 5R4.2@5464.57,5748.03
NET00472: 5R8.1 5R9.2 | length 131.9
  Top Layer, Top w5.91: v1(5787.4,5515.75) 5834.65,5515.75 5834.65,5507.87 5R8.1@5832.68,5507.87
  Bottom Layer, Bottom w5.91: v1(5787.4,5515.75) 5834.65,5515.75 5834.65,5507.87 5R9.2@5854.33,5507.87
NET00473: 5R12.1 5R13.2 | length 87.4
  Top Layer, Top w5.91: v1(5921.26,5779.53) 5921.26,5738.19 5R12.1@5923.23,5736.22
  Bottom Layer, Bottom w5.91: 5R13.2@5921.26,5736.22 v1(5921.26,5779.53)
NET00474: 5R6.1 5R7.2 | length 189
  Top Layer, Top w5.91: v1(5759.84,5480.31) 5759.84,5562.99 5R6.1@5771.65,5562.99
  Bottom Layer, Bottom w5.91: v1(5759.84,5480.31) 5759.84,5562.99 5R7.2@5771.65,5562.99
NET00475: 5R10.1 5R11.2 | length 130
  Top Layer, Top w5.91: 5R11.2@5899.61,5507.87 5940.94,5488.19 v1(5966.54,5476.38)
  Bottom Layer, Bottom w5.91: 5R10.1@5921.26,5507.87 5940.94,5488.19 v1(5966.54,5476.38)
NET00476: 5R14.1 5R15.2 | length 88.2
  Top Layer, Top w5.91: v1(5988.19,5779.53) 5988.19,5740.16 5R15.2@5992.13,5736.22
  Bottom Layer, Bottom w5.91: 5R14.1@5988.19,5736.22 v1(5988.19,5779.53)
NET00478: 5C2.1 5DA1.3 5R2.1 | length 221.4
  Top Layer, Top w5.91: 5DA1.3@5645.67,5649.61 5677.17,5649.61 5688.98,5661.42 v1@5688.98,5748.03 ; 5C2.1@5653.54,5748.03 v1@5688.98,5748.03 ; v1(5696.85,5748.03) v1@5688.98,5748.03
  Bottom Layer, Bottom w5.91: 5R2.1@5653.54,5748.03 v1(5696.85,5748.03)